# EAGLE board Schematic_1st_year_project_design (EAGLE 9.7.0)
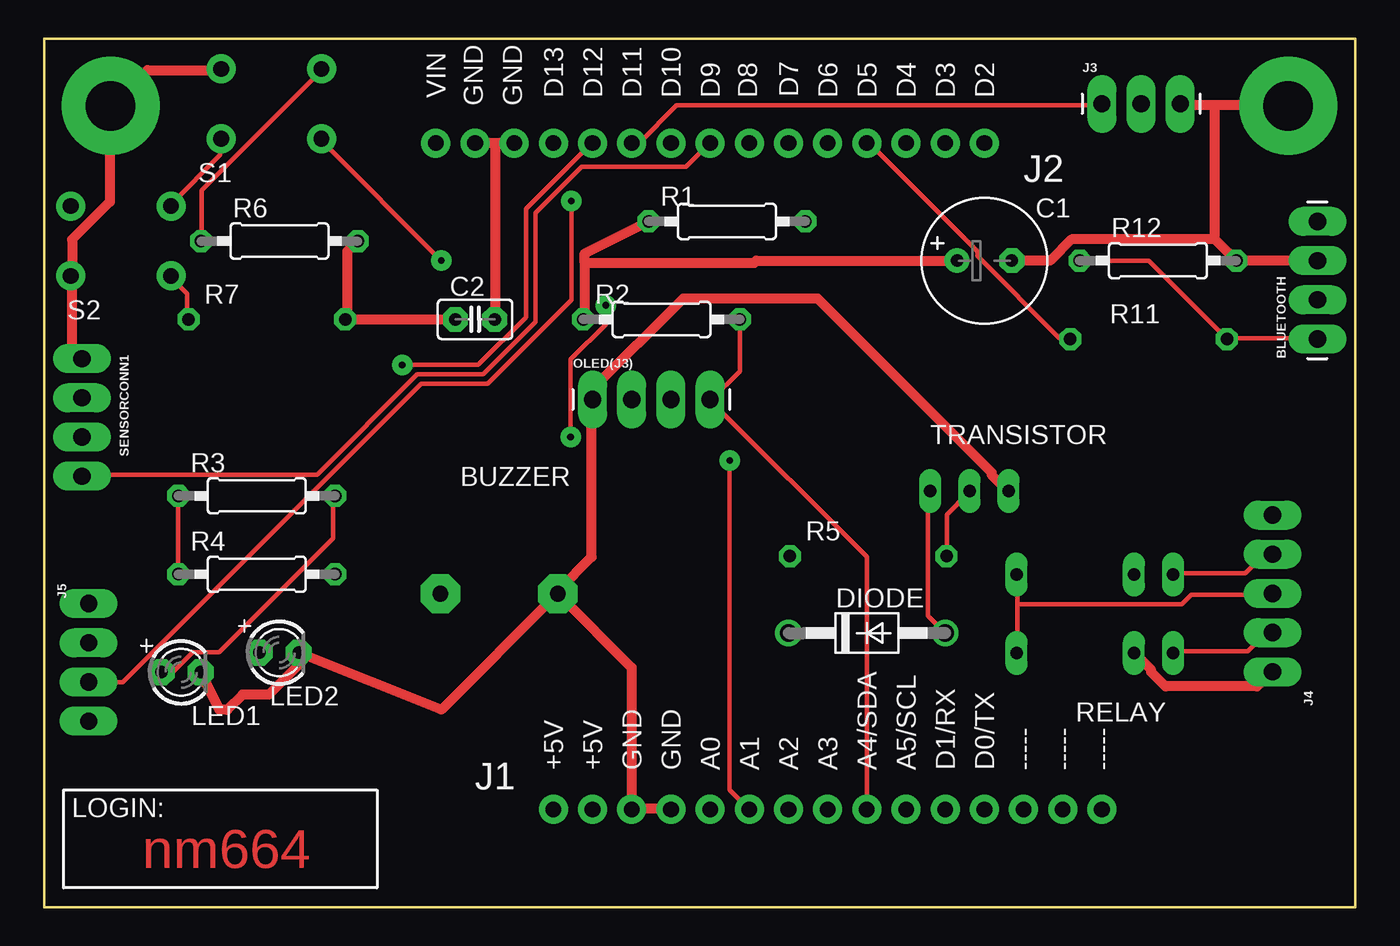
[diagram p0: board, top side]
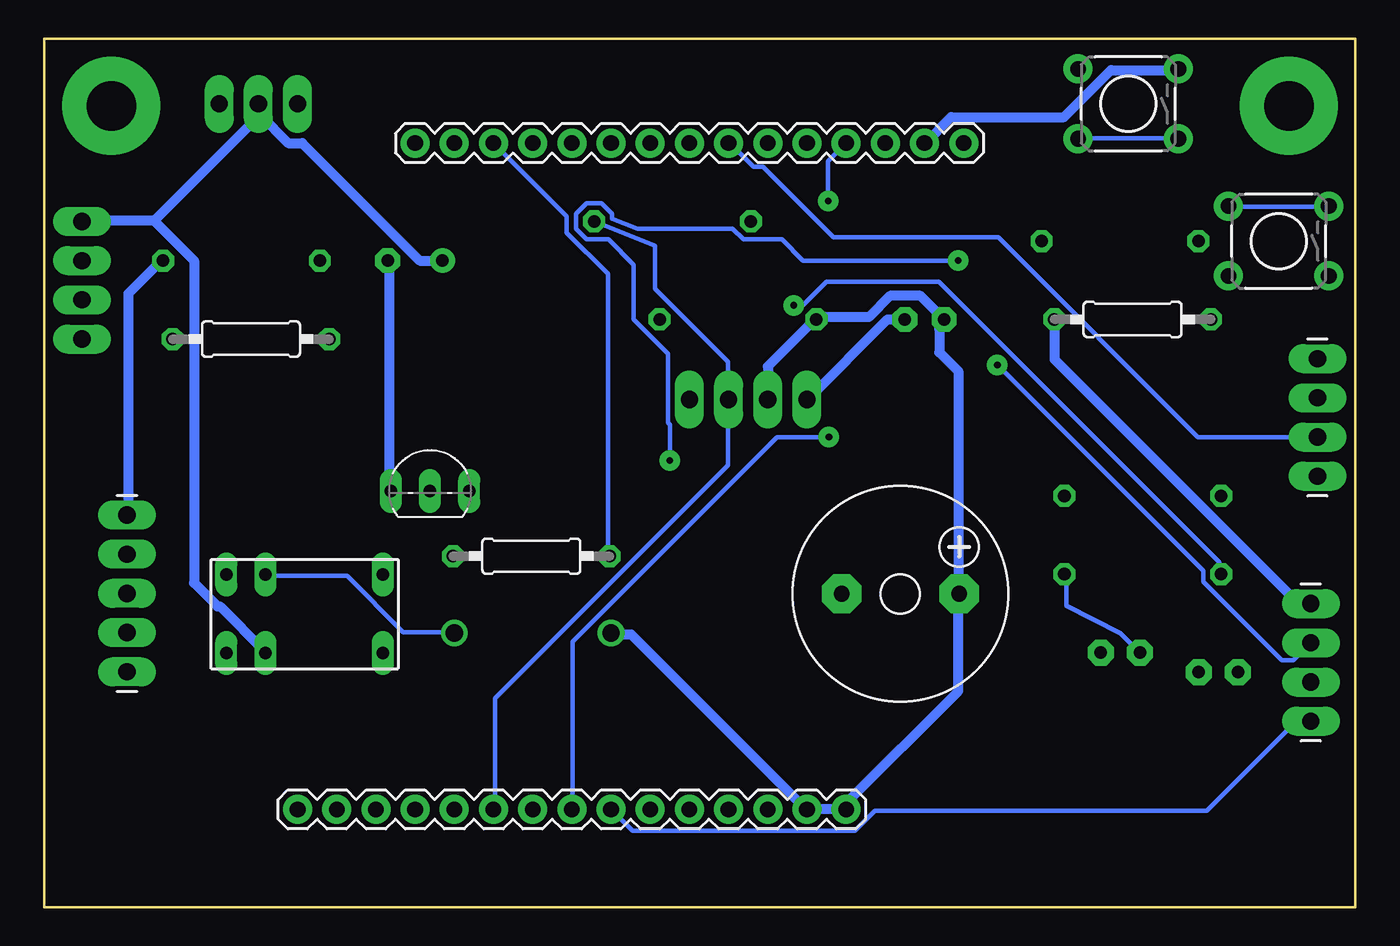
[diagram p1: board, bottom side, seen from below]

Size 85 x 56.3 mm. Coordinates in mm from the lower left corner, seen from the top.
Outline: 0,0 0,56.3 85,56.3 85,0 0,0
Copper layers (1*16): Top / Bottom
Stack-up Default Layer Stack: Top User Defined 0.035mm / Dielectric-1 User Defined 1.5mm / Bottom User Defined 0.035mm
Design rules: minimum copper width classes=2 25mil, minimum copper width all 0mil, minimum copper width 12mil, minimum drill size 17mil, copper clearance wire_polygon to wire_polygon 12mil, copper clearance wire_polygon to pad_smd 12mil, copper clearance wire_polygon to via 12mil, copper clearance pad_smd to pad_smd 12mil, copper clearance pad_smd to via 12mil, copper clearance via to via 12mil, copper clearance smd to pad (same net) 12mil, copper clearance smd to via (same net) 12mil, copper clearance smd to smd (same net) 12mil, dimension clearance 12mil, via restrict clearance 0mil, restrict clearance 0mil, drill distance 15mil, keepout clearance 0mil
Net classes: 2 Power2: width 0.635 mm

## Footprints (pad centres in the part's own frame; a part is rotated, then mirrored left to right if it is on the bottom)
1X04_LONGPADS = drill 1.118 pad 1.88 long: 1 0,0; 2 2.54,0; 3 5.08,0; 4 7.62,0
EL311_ATMEGA_INTRO_TSC033_V1_BUZZER_F/CM12P = drill 1.016 pad 2.54 octagon: + 3.81,0; - -3.81,0
E3,5-8 = drill 0.813 pad 1.6: + -1.778,0 | drill 0.813 pad 1.6 octagon: - 1.778,0
CAPACITOR-WIMA_C2.5-2 = drill 0.813 pad 1.6 octagon: 1 -1.27,0; 2 1.27,0
DIODE_DO41-10 = drill 1.118: A 5.08,0; C -5.08,0
STANDOFF-ELECTRICAL = drill 3.2 pad 6.35: P1 0,0
1X15 = drill 1.016 pad 1.88: 1 0,0; 2 2.54,0; 3 5.08,0; 4 7.62,0; 5 10.16,0; 6 12.7,0; 7 15.24,0; 8 17.78,0; 9 20.32,0; 10 22.86,0; 11 25.4,0; 12 27.94,0; 13 30.48,0; 14 33.02,0; 15 35.56,0
1X03_LONGPADS = drill 1.118 pad 1.88 long: 1 0,0; 2 2.54,0; 3 5.08,0
1X05_LONGPADS = drill 1.118 pad 1.88 long: 1 0,0; 2 2.54,0; 3 5.08,0; 4 7.62,0; 5 10.16,0
ADAFRUIT_LED3MM = drill 0.813 pad 1.676 octagon: A -1.27,0; K 1.27,0
0207/10 = drill 0.813 octagon: 1 -5.08,0; 2 5.08,0
RELAY_G5V1 = drill 0.813 long: 1 -5.08,-2.54; 2 -2.54,-2.54; 5 5.08,-2.54; 6 5.08,2.54; 9 -2.54,2.54; 10 -5.08,2.54
EL311-ROBOT_SPARKFUN-ELECTROMECHANICAL_TACTILE-PTH = drill 1.016 pad 1.88: 1 -3.251,2.261; 2 3.251,2.261; 3 -3.251,-2.261; 4 3.251,-2.261
TO92-EBC = drill 0.813 long: B 0,-1.27; C 2.54,-1.27; E -2.54,-1.27

## Placement (x,y rotation side)
BLUETOOTH  1X04_SMD_STRAIGHT_COMBO  [1X04_LONGPADS]  82.55,36.83 90 top
BUZZER  EL311_ATMEGA_INTRO_TSC033_V1_BUZZER_F/CM12P  [EL311_ATMEGA_INTRO_TSC033_V1_BUZZER_F/CM12P]  29.5,20.32 0 bottom
C1  10μF  [E3,5-8]  60.96,41.91 0 top
C2  0.1μF  [CAPACITOR-WIMA_C2.5-2]  27.94,38.1 0 top
DIODE  DIODE_1N4004  [DIODE_DO41-10]  53.34,17.78 0 top
H1  STANDOFF_ELECTRICAL  [STANDOFF-ELECTRICAL]  80.64,51.94 0 top
H2  STANDOFF_ELECTRICAL  [STANDOFF-ELECTRICAL]  4.32,51.94 0 top
J1  [1X15]  33.02,6.35 180 bottom
J2  [1X15]  60.96,49.53 0 bottom
J3  1x3 RA Female .1"  [1X03_LONGPADS]  68.58,52.07 0 top
J4  [1X05_LONGPADS]  79.64,15.27 90 bottom
J5  1X04_SMD_STRAIGHT_COMBO  [1X04_LONGPADS]  2.9,19.68 270 bottom
LED1  [ADAFRUIT_LED3MM]  8.89,15.24 0 top
LED2  [ADAFRUIT_LED3MM]  15.24,16.51 0 top
OLED(J3)  1X04_SMD_STRAIGHT_COMBO  [1X04_LONGPADS]  35.56,32.91 0 top
R1  4k7  [0207/10]  44.27,44.45 180 top
R2  4k7  [0207/10]  40.03,38.1 180 top
R3  470R  [0207/10]  13.79,26.67 0 top
R4  470R  [0207/10]  13.79,21.59 0 top
R5  1k5  [0207/10]  53.43,22.76 180 bottom
R6  10k  [0207/10]  15.27,43.18 0 top
R7  10k  [0207/10]  14.45,38.1 180 bottom
R11  2k2  [0207/10]  71.6,36.83 180 bottom
R12  3k3  [0207/10]  72.21,41.91 0 top
RELAY  RELAY_G5V1  [RELAY_G5V1]  68.12,19.02 0 bottom
S1  [EL311-ROBOT_SPARKFUN-ELECTROMECHANICAL_TACTILE-PTH]  14.73,52.07 180 bottom
S2  [EL311-ROBOT_SPARKFUN-ELECTROMECHANICAL_TACTILE-PTH]  4.98,43.18 180 bottom
SENSORCONN1  1X04_SMD_STRAIGHT_COMBO  [1X04_LONGPADS]  2.47,35.56 270 bottom
TRANSISTOR  [TO92-EBC]  59.99,28.24 0 bottom

## Library data of the parts
BLUETOOTH J5 OLED(J3) SENSORCONN1 = EENG3110_V2_Library; PROD_ID: CONN-08511; SF_ID: PRT-12638
BUZZER = EENG3110_V2_Library; OC_FARNELL: unknown; OC_NEWARK: unknown
C1 C2 DIODE LED1 LED2 R1-R7 R11 R12 S1 S2 TRANSISTOR = EENG3110_V2_Library
H1 H2 = SparkFun-Hardware
J1 J2 = SparkFun-Connectors
J3 = EENG3110_V2_Library; PROD_ID: CONN-10925; SF_ID: PRT-08235; SF_SKU: PRT-08433
J4 = EENG3110_V2_Library; PROD_ID: CONN-08528; SF_ID: GPS-08288
RELAY = EENG3110_V2_Library; MPN: G5V-1-DC24; OC_FARNELL: 9949593; OC_NEWARK: 36M6377

## Nets
+5V [Power2]: BLUETOOTH.4 BUZZER.+ C1.+ C2.1 DIODE.C J1.1 J1.2 J3.2 J4.1 J5.1 OLED(J3).2 R1.2 R2.2 R6.2 R7.2 RELAY.2
A1: J1.6 S1.1 S1.2 S2.3 S2.4
A2: J1.7 J5.4
A3: J1.8 R3.1 R4.1
A4/SDA: J1.9 OLED(J3).4 R2.1
A5/SCL: J1.10 OLED(J3).3 R1.1
D4: J2.3 R5.1
D5: J2.4 R11.1
D9: J2.8 SENSORCONN1.4
D10: J2.9 SENSORCONN1.3
D11/MOSI/SERVO: J2.10 J3.1
D12/MISO: J2.11 J5.2
D13/SCK: J2.12 J5.3
GND [Power2]: BLUETOOTH.3 BUZZER.- C1.- C2.2 H1.P1 H2.P1 J1.3 J1.4 J2.13 J2.14 J3.3 J4.5 LED1.K LED2.K OLED(J3).1 R12.2 S1.3 S2.1 SENSORCONN1.1 TRANSISTOR.E
N$3: LED1.A R3.2
N$4: R5.2 TRANSISTOR.B
N$5: LED2.A R4.2
N$8: J4.4 RELAY.10
N$9: J4.3 RELAY.5 RELAY.6
N$10: J4.2 RELAY.1
N$11: R6.1 S1.4
N$12: R7.1 S2.2
N$16: BLUETOOTH.1 R11.2 R12.1
N$17: DIODE.A RELAY.9 TRANSISTOR.C
VIN [Power2]: J2.15

## Tracks (layer width: path | path; a pad name or v marks a point on that pad's centre or on a via)
+5V
  Top 0.635: RELAY.2 70.71,16.46 71.78,15.39 71.78,15.24 72.69,14.33 78.64,14.33 79.55,15.24 J4.1 | 35.05,41.76 35.05,42.38 R1.2 | 35.05,41.76 35.05,38.1 R2.2 | R6.2 20.27,43.13 19.66,42.52 19.66,38.1 R7.2 C2.1 | C1.+ 46.18,41.91 46.02,41.76 35.05,41.76
  Bottom 0.635: C1.+ 60.66,41.91 68.28,49.53 69.19,49.53 71.02,51.36 71.02,51.97 J3.2 71.17,51.21 77.88,44.5 | 77.88,44.5 82.45,44.5 BLUETOOTH.4 | 77.88,44.5 75.29,41.91 75.29,21.03 73.76,19.51 73.61,19.51 70.71,16.61 RELAY.2 | DIODE.C 48.16,17.68 46.94,17.68 35.66,6.4 J1.2 35.36,6.4 33.07,6.4 J1.1 33.07,6.71 25.76,14.02 25.76,20.27 BUZZER.+ 25.76,20.57 25.76,34.75 26.98,35.97 26.98,37.49 26.67,37.8 C2.1 28.19,39.62 30.18,39.62 31.55,38.25 34.75,38.25 R2.2 35.05,38.1 38.1,35.05 OLED(J3).2 | J5.1 3.68,19.68 19.51,35.51 19.51,38.1 R7.2
A1  (via drill 0.43)
  Top 0.305: S1.1 11.43,49.68 11.43,48.77 8.23,45.57 S2.4 | v44.45,28.96 44.45,7.62 J1.6 | v25.76,41.91 17.98,49.68 S1.2
  Bottom 0.305: S2.3 1.83,45.41 8.23,45.41 S2.4 | v25.76,41.91 35.81,41.91 37.19,43.28 39.68,43.28 40.38,43.98 46.54,43.98 48.18,44.64 48.18,44.93 48.87,45.62 49.84,45.62 50.52,44.93 50.52,43.97 49.84,43.28 48.41,43.28 46.79,41.66 46.79,38.1 44.58,35.89 44.58,31.39 44.45,31.26 v44.45,28.96 | S1.1 11.58,49.84 17.98,49.84 S1.2
A2
  Bottom 0.305: J1.7 46.86,4.95 32.44,4.95 31.15,6.25 9.65,6.25 3.83,12.06 J5.4
A3  (via drill 0.43)
  Top 0.305: R4.1 R3.1 | v34.14,30.48 34.14,35.51 36.42,37.8 v36.42,39.01
  Bottom 0.305: v34.14,30.48 37.49,30.48 50.75,17.22 50.75,6.4 J1.8 | v36.42,39.01 35.81,39.01 34.29,40.54 27.01,40.54 8.84,22.36 8.84,21.64 R4.1
A4/SDA
  Top 0.305: R2.1 45.11,34.75 43.28,32.92 OLED(J3).4 43.28,32.77 53.34,22.71 J1.9
A5/SCL
  Bottom 0.305: R1.1 45.41,42.88 45.41,40.08 40.69,35.36 40.69,32.92 OLED(J3).3 40.69,32.77 40.69,28.65 55.78,13.56 55.78,6.4 J1.10
D4
  Bottom 0.305: R5.1 48.46,22.86 48.46,41.05 51.13,43.71 51.13,44.78 J2.3
D5
  Top 0.305: J2.4 53.49,49.53 60.5,42.52 60.5,42.22 65.84,36.88 66.45,36.88 R11.1
D9
  Top 0.305: SENSORCONN1.4 2.59,28.04 17.69,28.04 24.19,34.54 28.45,34.54 31.85,37.95 31.85,45.02 34.84,48.01 41.6,48.01 43.13,49.53 J2.8
D10
  Bottom 0.305: SENSORCONN1.3 10.21,30.48 23.16,43.43 33.83,43.43 38.41,48.01 39.01,48.01 40.54,49.53 J2.9
D11/MOSI/SERVO
  Top 0.305: J2.10 38.56,49.53 41,51.97 68.58,51.97 J3.1
D12/MISO  (via drill 0.43)
  Top 0.305: v23.22,35.15 28.14,35.15 31.24,38.25 31.24,45.27 35.5,49.53 J2.11
  Bottom 0.305: J5.2 4.04,16 4.78,16 9.88,21.11 9.88,21.82 v23.22,35.15
D13/SCK  (via drill 0.43)
  Top 0.305: v34.19,45.77 34.19,39.37 28.75,33.93 24.45,33.93 5.12,14.61 J5.3
  Bottom 0.305: J2.12 34.19,48.36 v34.19,45.77
GND
  Top 0.635: 75.89,51.97 80.62,51.97 H1.P1 | 75.89,51.97 73.76,51.97 J3.3 | BLUETOOTH.3 R12.2 77.11,42.06 75.89,43.28 | C1.- 65.23,41.91 66.6,43.28 75.89,43.28 | 75.89,43.28 75.89,51.97 | SENSORCONN1.1 2.44,35.66 1.83,36.27 1.83,40.84 S2.1 1.83,41.15 1.83,43.28 4.27,45.72 4.27,51.66 H2.P1 4.42,51.97 6.71,54.25 11.43,54.25 S1.3 | J2.13 29.26,49.53 | 29.26,49.53 J2.14 | 29.26,49.53 29.26,38.1 C2.2 | LED1.K 11.38,12.8 11.89,12.8 12.87,13.78 14.57,13.78 16.51,15.71 LED2.K 25.76,12.81 33.07,20.12 BUZZER.- | J1.4 40.54,6.4 38.1,6.4 J1.3 38.1,15.54 33.38,20.27 BUZZER.- | BUZZER.- 33.38,20.57 35.51,22.71 35.51,32.77 OLED(J3).1 35.51,33.22 35.51,33.53 41.45,39.47 50.14,39.47 61.42,28.19 61.42,28.04 62.48,26.98 TRANSISTOR.E
  Bottom 0.635: TRANSISTOR.E 62.64,26.98 62.64,41.91 C1.- | J4.5 79.55,25.45 79.55,39.78 77.42,41.91 R12.2 | C2.2 30.33,38.1 35.51,32.92 OLED(J3).1 | S1.3 11.58,54.25 15.85,54.25 18.9,51.21 26.21,51.21 27.89,49.53 J2.14
N$3
  Top 0.305: R3.2 18.75,26.67 18.75,23.93 11.35,16.54 9.62,16.54 8.33,15.24 LED1.A
N$4
  Top 0.305: R5.2 58.52,22.86 58.52,25.45 59.89,26.82 TRANSISTOR.B
N$5
  Bottom 0.305: R4.2 18.75,21.49 18.75,19.53 15.24,17.78 LED2.A
N$8
  Top 0.305: RELAY.10 73.3,21.64 77.88,21.64 79.1,22.86 79.55,22.86 J4.4
N$9
  Top 0.305: 63.09,19.66 63.09,21.49 RELAY.6 | 63.09,19.66 63.09,16.61 RELAY.5 | 63.09,19.66 73.76,19.66 74.37,20.27 79.55,20.27 J4.3
N$10
  Top 0.305: RELAY.1 73.3,16.61 78.03,16.61 79.1,17.68 79.55,17.68 J4.2
N$11
  Top 0.305: R6.1 10.21,43.28 10.21,46.48 17.98,54.25 S1.4
N$12
  Top 0.305: R7.1 9.3,38.1 9.3,39.78 8.23,40.84 S2.2
N$16
  Top 0.305: BLUETOOTH.1 82.45,36.88 76.81,36.88 R11.2 76.66,36.88 71.63,41.91 R12.1
N$17
  Top 0.305: DIODE.A 57.3,18.9 57.3,26.82 TRANSISTOR.C
  Bottom 0.305: RELAY.9 70.56,21.49 65.38,21.49 61.72,17.83 58.52,17.83 DIODE.A

## Text on the board
Top: nm664
NamesTop: D7 | VIN | GND | GND | D13 | D12 | D11 | D10 | D9 | D8 | D6 | D5 | D4 | D3 | D2 | J2 | +5V | +5V | GND | GND | A0 | A1 | A2 | A3 | A4/SDA | A5/SCL | D1/RX | D0/TX | ----- | ----- | ----- | J1 | LOGIN: